# EAGLE board main (EAGLE 7.7.0)
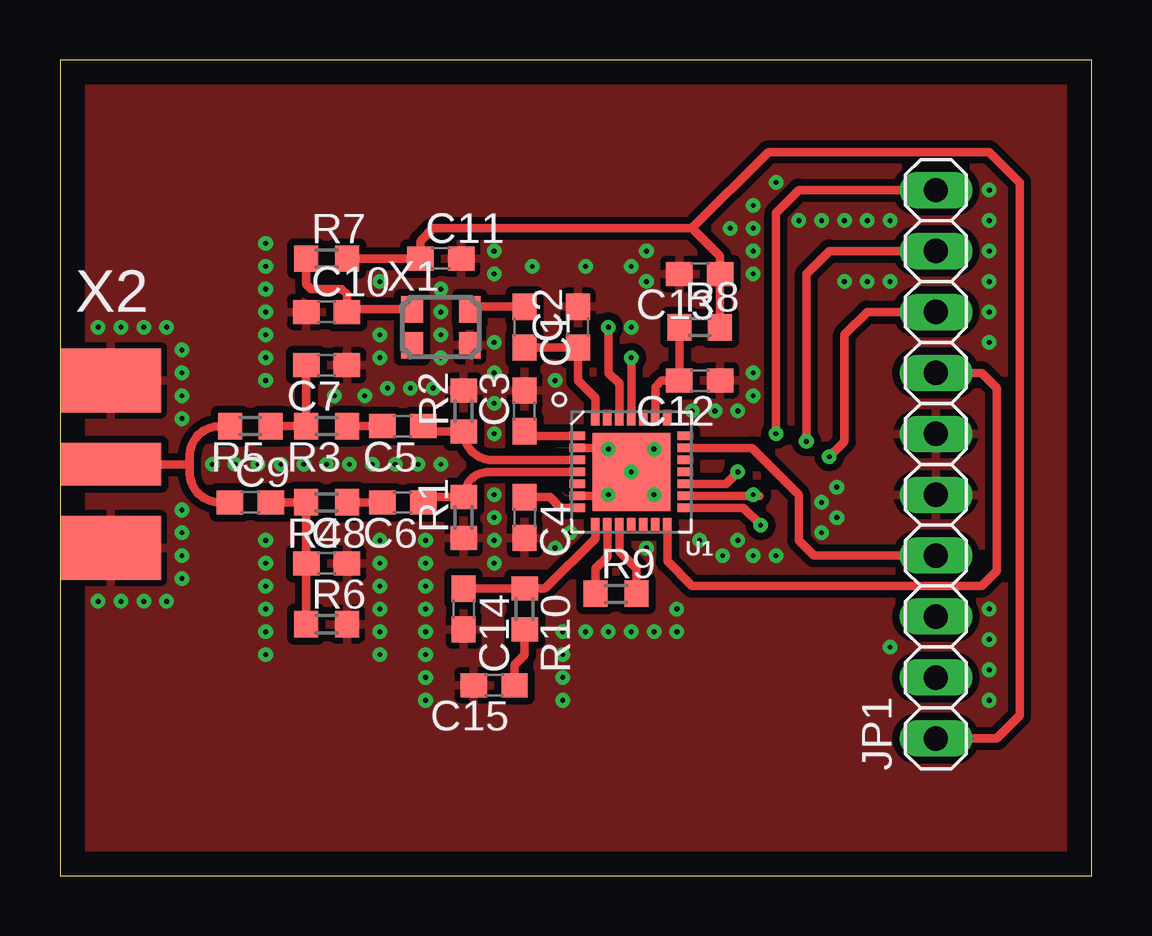
[diagram p0: board, top side]
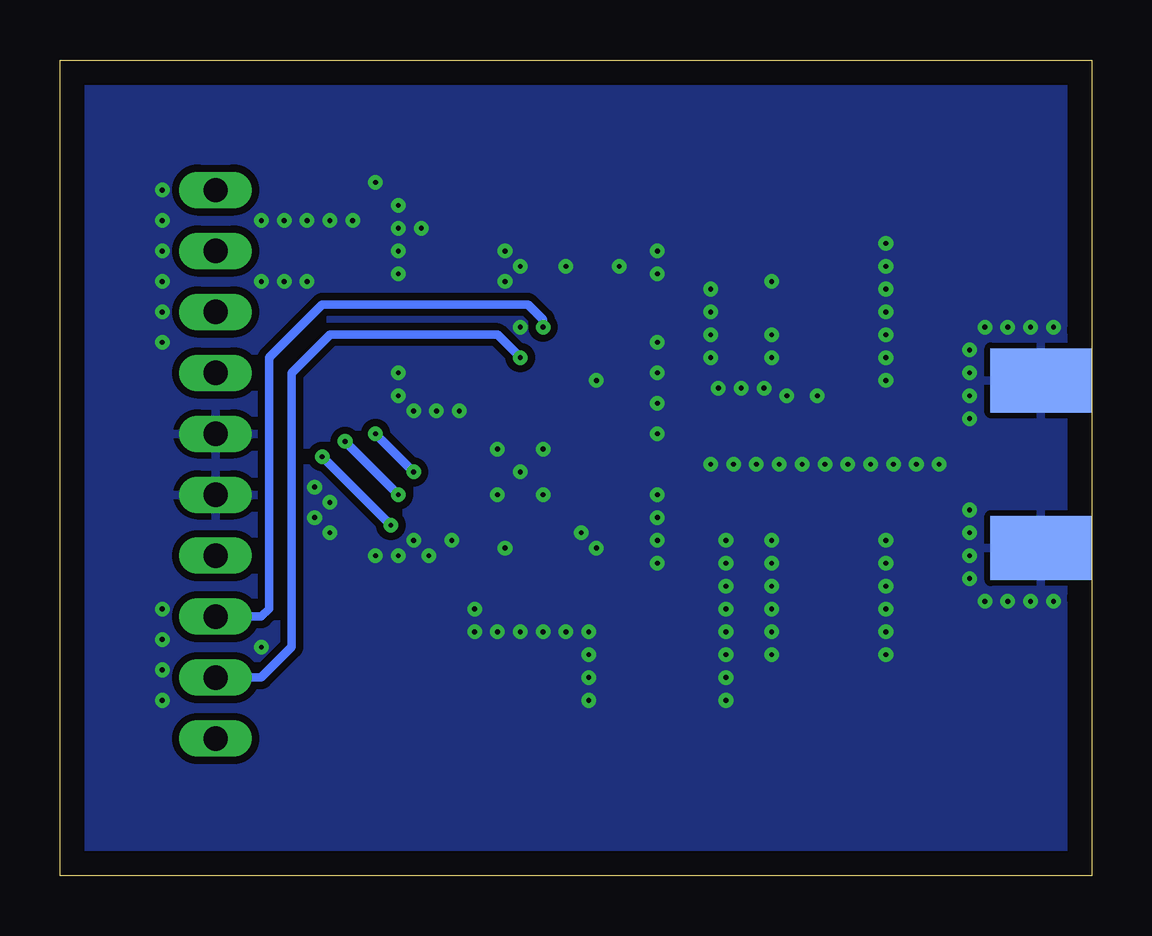
[diagram p1: board, bottom side, seen from below]

Size 43 x 34 mm. Coordinates in mm from the lower left corner, seen from the top.
Outline: 0,0 43,0 43,34 0,34 0,0
Copper layers (1*16): Top 0.035mm / dielectric 1.5mm / Bottom 0.035mm
Design rules "default *": minimum track width 10mil, minimum drill 24mil, track to track 8mil, track to pad 8mil, pad to pad 8mil, via to via 8mil, smd to smd 8mil, copper to edge 40mil, drill to drill 8mil, minimum pad ring 10mil, minimum via ring 8mil, stop-mask expansion 4mil, vias tented up to drill 0.2mm, thermal gap 10mil

## Footprints (pad centres in the part's own frame; a part is rotated, then mirrored left to right if it is on the bottom)
C0603 = smd 1.1 x 1: 1 -0.85,0; 2 0.85,0
1X10 = drill 1.016 long: 1 -11.43,0; 2 -8.89,0; 3 -6.35,0; 4 -3.81,0; 5 -1.27,0; 6 1.27,0; 7 3.81,0; 8 6.35,0; 9 8.89,0; 10 11.43,0
R0603 = smd 1 x 1.1: 1 -0.85,0; 2 0.85,0
QFN28-5X5-WITH-CENTER-PAD = smd 0.65 x 0.35: 1 -2.25,1.5; 2 -2.25,1; 3 -2.25,0.5; 4 -2.25,0; 5 -2.25,-0.5; 6 -2.25,-1; 7 -2.25,-1.5; 15 2.25,-1.5; 16 2.25,-1; 17 2.25,-0.5; 18 2.25,0; 19 2.25,0.5; 20 2.25,1; 21 2.25,1.5 | smd 0.35 x 0.65: 8 -1.5,-2.25; 9 -1,-2.25; 10 -0.5,-2.25; 11 0,-2.25; 12 0.5,-2.25; 13 1,-2.25; 14 1.5,-2.25; 22 1.5,2.25; 23 1,2.25; 24 0.5,2.25; 25 0,2.25; 26 -0.5,2.25; 27 -1,2.25; 28 -1.5,2.25 | smd 3.25 x 3.25: PAD 0,0
ASE = smd 0.9 x 1.1: 1 -1.2,-0.75; 2 1.2,-0.75; 3 1.2,0.75; 4 -1.2,0.75
J502-ND-142-0711-821/826 = smd 4.191 x 1.778: 1 2.115,0 | smd 4.191 x 2.667: G@1 2.115,3.495; G@2 2.115,-3.495 | smd 4.191 x 2.667 bottom: G@3 2.115,3.495; G@4 2.115,-3.495

## Placement (x,y rotation side)
C1  10p  [C0603]  19.37,22.86 270 top
C2  6.8p  [C0603]  21.59,22.86 90 top
C3  100p  [C0603]  19.37,19.37 90 top
C4  100p  [C0603]  19.37,14.92 270 top
C5  4.3p  [C0603]  14.29,18.73 180 top
C6  4.3p  [C0603]  14.29,15.56 180 top
C7  11p  [C0603]  11.11,21.27 180 top
C8  5.6p  [C0603]  11.11,13.02 0 top
C9  5.1p  [C0603]  7.94,15.56 0 top
C10  10n  [C0603]  11.11,23.5 0 top
C11  100n  [C0603]  15.88,25.72 0 top
C12  10n  [C0603]  26.67,20.64 180 top
C13  100n  [C0603]  26.67,25.08 180 top
C14  39p  [C0603]  16.83,11.11 270 top
C15  10n  [C0603]  18.1,7.94 180 top
JP1  [1X10]  36.51,17.14 90 top
R1  100nH  [R0603]  16.83,14.92 90 top
R2  100nH  [R0603]  16.83,19.37 90 top
R3  43nH  [R0603]  11.11,18.73 180 top
R4  43nH  [R0603]  11.11,15.56 180 top
R5  27nH  [R0603]  7.94,18.73 180 top
R6  27nH  [R0603]  11.11,10.48 0 top
R7  BEAD  [R0603]  11.11,25.72 0 top
R8  BEAD  [R0603]  26.67,22.86 0 top
R9  10nH  [R0603]  23.18,11.75 0 top
R10  12k  [R0603]  19.37,11.11 270 top
U1  AX5043  [QFN28-5X5-WITH-CENTER-PAD]  23.81,16.83 0 top
X1  12.000MHz  [ASE]  15.88,22.86 0 top
X2  SMA  [J502-ND-142-0711-821/826]  0,17.14 0 top

## Library data of the parts
C1-C15 R1-R10 = rcl
JP1 = pinhead
U1 = AX5043-radio
X1 = ILSI_tcxo; OC_FARNELL: unknown; OC_NEWARK: unknown
X2 = con-coax; MF: JOHNSON COMPONENTS; MPN: 142-0711-821; OC_FARNELL: 1019328; OC_NEWARK: 16F3627

## Nets
+3V3: C11.1 C13.1 JP1.1 R7.2 R8.2
CLK_REF: C1.2 C2.1 U1.28
CS: JP1.7 U1.14
DEMOD_OUT: JP1.4 U1.20
GND: C2.2 C3.2 C4.2 C7.1 C8.2 C10.1 C11.2 C12.1 C13.2 C14.2 C15.2 JP1.5 JP1.6 R1.1 R2.2 R6.2 U1.2 U1.6 U1.PAD X1.2 X2.G@1 X2.G@2 X2.G@3 X2.G@4
MISO: JP1.9 U1.16
MOD_IN_A: JP1.2 U1.25
MOD_IN_B: JP1.3 U1.26
MOSI: JP1.10 U1.17
N$1: C5.1 R2.1 U1.3
N$2: C6.1 R1.2 U1.4
N$3: C12.2 R8.1 U1.23
N$6: C6.2 R4.1
N$7: C4.1 U1.7
N$8: C3.1 U1.1
N$9: C1.1 X1.3
N$10: C5.2 R3.1
N$11: C10.2 R7.1 X1.4
N$12: C8.1 C9.2 R4.2 R6.1
N$13: C7.2 R3.2 R5.1
N$14: C9.1 R5.2 X2.1
N$15: R9.1 U1.9
N$16: R9.2 U1.10
N$17: C14.1 R10.1 U1.8
N$19: C15.1 R10.2
SCLK: JP1.8 U1.15

## Tracks (layer width: path | path; a pad name or v marks a point on that pad's centre or on a via)
+3V3
  Top 0.356: R8.2 C13.1 27.52,25.82 26.35,26.99 | R7.2 C11.1 15.03,26.45 15.56,26.99 26.35,26.99 | JP1.1 39.05,5.71 40.01,6.67 40.01,28.89 38.73,30.16 29.53,30.16 26.35,26.99
CLK_REF
  Top 0.356: U1.28 22.31,19.91 21.59,20.64 C2.1 C1.2
CS
  Top 0.356: U1.14 25.31,13.11 26.35,12.06 38.42,12.06 39.05,12.7 39.05,20.32 38.42,20.95 JP1.7
DEMOD_OUT
  Top 0.356: U1.20 28.84,17.83 30.8,15.88 30.8,13.97 31.43,13.34 JP1.4
GND  (via drill 0.2 pad 0.2)
  Top 0.356: U1.6 22.81,15.83 v22.86,15.88 | U1.2 22.81,17.83 v22.86,17.78
  other vias: 24.77,17.78 23.81,16.83 24.77,15.88 21.27,14.29 20.64,13.65 18.1,13.02 18.1,13.97 18.1,14.92 18.1,15.88 6.35,17.14 7.3,17.14 8.26,17.14 9.21,17.14 10.16,17.14 11.11,17.14 12.06,17.14 13.02,17.14 13.97,17.14 14.92,17.14 15.88,17.14 26.35,19.37 27.3,19.37 28.26,19.37 28.89,20 28.89,20.95 23.81,22.86 24.45,26.04 24.45,24.77 23.81,25.4 20.64,20.64 18.1,20.95 18.1,18.41 18.1,19.68 18.1,22.23 15.88,24.45 15.88,23.5 15.88,22.54 15.88,21.59 15.56,20.32 14.61,20.32 13.65,20.32 13.34,22.54 13.34,21.59 11.43,20 12.7,20 1.59,22.86 2.54,22.86 3.49,22.86 4.45,22.86 5.08,21.91 5.08,20.95 5.08,20 5.08,19.05 5.08,15.24 5.08,14.29 5.08,13.34 5.08,12.38 1.59,11.43 2.54,11.43 3.49,11.43 4.45,11.43 15.24,13.97 15.24,13.02 15.24,12.06 15.24,11.11 15.24,10.16 15.24,9.21 13.34,13.97 13.34,13.02 13.34,12.06 13.34,11.11 13.34,10.16 13.34,9.21 15.24,8.26 15.24,7.3 20.95,10.16 21.91,10.16 22.86,10.16 23.81,10.16 24.77,10.16 25.72,10.16 25.72,11.11 24.45,13.65 26.67,13.97 27.62,13.34 28.26,13.97 28.89,13.34 29.84,13.34 32.38,16.19 31.75,15.56 32.38,14.92 31.75,14.29 38.73,11.11 38.73,9.84 38.73,8.57 38.73,7.3 34.61,9.53 34.61,24.77 33.66,24.77 32.7,24.77 38.73,27.3 38.73,24.77 38.73,22.23 38.73,23.5 38.73,26.04 38.73,28.57 8.57,24.45 8.57,23.5 8.57,22.54 8.57,21.59 8.57,20.64 8.57,25.4 8.57,26.35 8.57,13.97 8.57,13.02 8.57,12.06 8.57,11.11 8.57,10.16 8.57,9.21 13.34,24.77 18.1,26.04 18.1,25.08 21.91,25.4 19.68,25.4 20.95,9.21 20.95,8.26 20.95,7.3 28.89,25.08 28.89,26.04 28.89,26.99 28.89,27.94 27.94,26.99 29.84,28.89 34.61,27.3 33.66,27.3 32.7,27.3 31.75,27.3 30.8,27.3
  pour Top (isolate 0.305): 0,0 42.86,0 42.86,33.97 0,33.97
  pour Bottom (isolate 0.305): 0,0 42.86,0 42.86,33.97 0,33.97
MISO  (via drill 0.2 pad 0.2)
  Top 0.356: U1.16 29.16,15.83 v28.89,15.88 | v31.11,18.1 31.11,25.08 32.07,26.04 JP1.9
  Bottom 0.356: v28.89,15.88 v31.11,18.1
MOD_IN_A  (via drill 0.2 pad 0.2)
  Top 0.356: U1.25 v23.81,21.59
  Bottom 0.356: v23.81,21.59 24.77,22.54 31.75,22.54 33.34,20.95 33.34,9.53 34.61,8.26 JP1.2
MOD_IN_B  (via drill 0.2 pad 0.2)
  Top 0.356: U1.26 23.31,20.5 22.86,20.95 v22.86,22.86
  Bottom 0.356: v22.86,22.86 22.86,23.18 23.5,23.81 32.07,23.81 34.29,21.59 34.29,11.11 34.61,10.79 JP1.3
MOSI  (via drill 0.2 pad 0.2)
  Top 0.356: U1.17 27.76,16.33 v28.26,16.83 | v29.84,18.41 29.84,27.62 30.8,28.57 JP1.10
  Bottom 0.356: v28.26,16.83 v29.84,18.41
N$1
  Top 0.356: U1.3 18.02,17.33 arc-90 R2.1 15.35,18.52 arc-90 C5.1
N$2
  Top 0.356: U1.4 17.88,16.83 arc90 R1.2 15.35,15.77 arc90 C6.1
N$3
  Top 0.356: U1.23 24.81,20.37 25.08,20.64 C12.2 R8.1
N$6
  Top 0.356: R4.1 C6.2
N$7
  Top 0.356: U1.7 20.87,15.33 20.42,15.77 C4.1
N$8
  Top 0.356: U1.1 19.37,18.33 C3.1
N$9
  Top 0.356: C1.1 17.18,23.71 X1.3
N$10
  Top 0.356: C5.2 R3.1
N$11
  Top 0.356: X1.4 12.08,23.61 C10.2 11.96,24.23 11.75,24.45 10.48,24.45 10.26,24.66 R7.1
N$12
  Top 0.356: C9.2 R4.2 C8.1 R6.1
N$13
  Top 0.356: C7.2 R3.2 R5.1
N$14
  Top 0.356: R5.2 6.67,18.73 arc90 5.4,17.46 5.4,17.14 | C9.1 6.67,15.56 arc-90 5.4,16.83 5.4,17.14 | X2.1 5.4,17.14
N$15
  Top 0.356: U1.9 22.81,13.29 22.33,12.8 R9.1
N$16
  Top 0.356: U1.10 23.31,13.52 24.03,12.8 R9.2
N$17
  Top 0.356: U1.8 22.31,14.06 20.22,11.96 R10.1 C14.1
N$19
  Top 0.356: C15.1 18.95,8.79 19.37,9.21 R10.2
SCLK  (via drill 0.2 pad 0.2)
  Top 0.356: U1.15 28.49,15.33 v29.21,14.61 | v32.07,17.46 32.7,18.1 32.7,22.54 33.66,23.5 JP1.8
  Bottom 0.356: v29.21,14.61 v32.07,17.46

## Text on the board
tDocu: M17/OpenRTX 2021 / BAND UHF[*] VHF[ ] | MOSI | MISO | SCK | CS | GND | GND | DEM | MOD_A | MOD_B | 3.3V | AX5043 EVAL BOARD / SP5WWP, IU2KWO et al.